# Altium PCB PCB.PcbDoc (part 2 of 2)
Units mm, origin at the board's own origin, x right, y up, seen from the top; angles counter-clockwise.
Board outline 86.23 x 63.63 mm, 4 copper layers (Top Layer, GND top, GND bottom, Bottom Layer), stack 0.603 mm thick; 101 components, 79 nets, 364 pads, 164 vias.
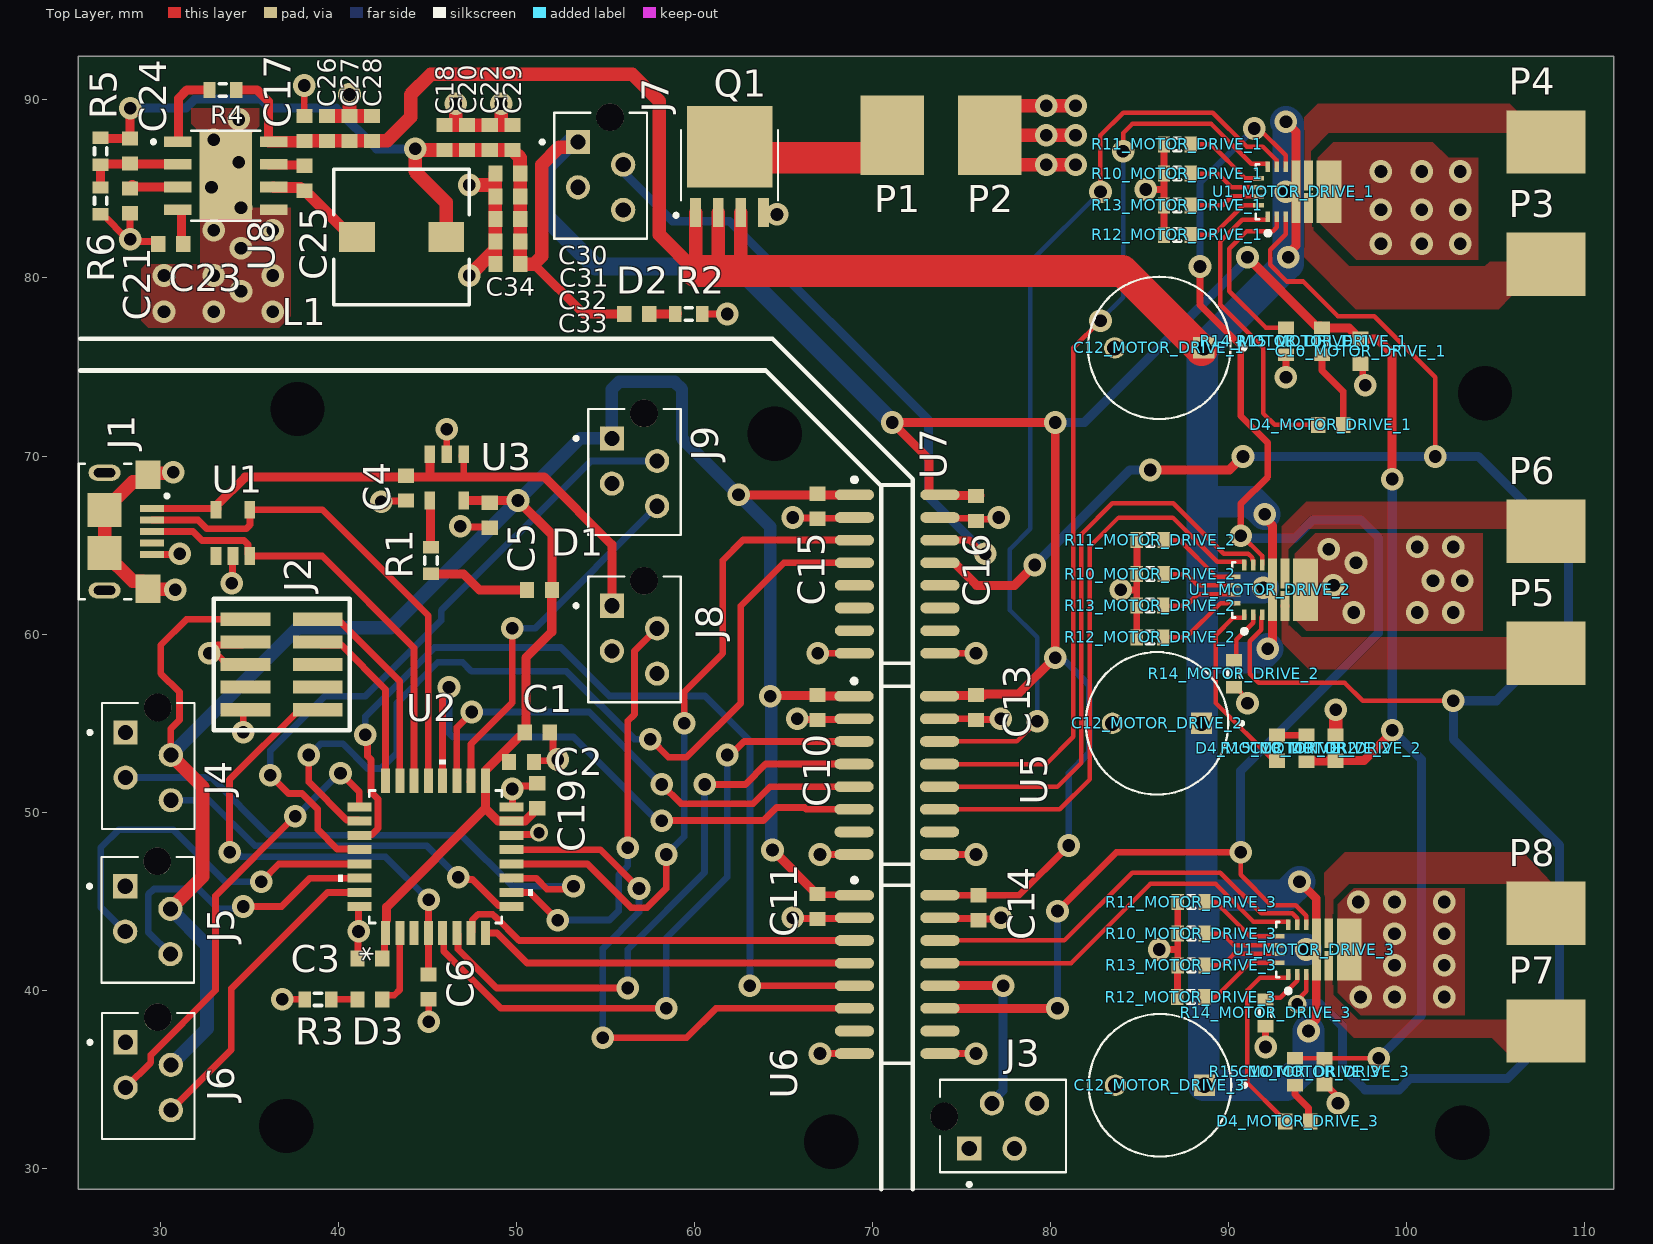
[diagram p0: Top Layer view]

## Silkscreen, mask and mechanical layers (free items; w line width, h text height) (continued)
Top Overlay: (continued)
  lines w0.254: 25.527,74.803 64.008,74.803 70.485,68.326 70.485,28.829 ; 25.527,76.581 64.389,76.581 72.263,68.707 72.263,28.829
Mechanical 1:
  lines w0.508: 25.4,28.829 25.4,82.423 25.4,92.456 111.633,92.456 111.633,28.829 105.41,28.829 25.4,28.829

## Text inside footprints (layer, text, board x,y; h text height)
J1: Mechanical 13 "PCB END" at 25.587,61.011 h0.41 r270
U2: Top Overlay "*" at 42.52,41.593 h1.27 r90; Mechanical 13 "*" at 42.901,43.967 h1.27 r90